# EAGLE board CT_schematic (EAGLE 7.6.0)

Size 100 x 80 mm. Coordinates in mm from the lower left corner, seen from the top.
Outline: 0,0 100,0 100,80 0,80 0,0
Copper layers (1*16): Top 0.035mm / dielectric 1.5mm / Bottom 0.035mm
Design rules "default": minimum track width 10mil, minimum drill 24mil, track to track 8mil, track to pad 8mil, pad to pad 8mil, via to via 8mil, smd to smd 8mil, copper to edge 40mil, drill to drill 8mil, minimum pad ring 10mil, minimum via ring 8mil, stop-mask expansion 4mil, vias tented up to drill 0mil, thermal gap 10mil

## Footprints (pad centres in the part's own frame; a part is rotated, then mirrored left to right if it is on the bottom)
C0603 = smd 0.8 x 0.8: 1 -0.762,0; 2 0.762,0
C0402 = smd 0.5 x 0.5: 1 -0.508,0; 2 0.508,0
C1210 = smd 1.2 x 2.5: 1 -1.524,0; 2 1.524,0
C0805 = smd 1.2 x 1.3: 1 -1.016,0; 2 1.016,0
EXV-9H = smd 3.505 x 1.676: 1 -2.857,0; 2 2.857,0
L0603 = smd 0.8 x 0.8: 1 -0.762,0; 2 0.762,0
L1210 = smd 1.2 x 2.5: 1 -1.524,0; 2 1.524,0
PJ-037B_PACKAGE = drill 3.7 square: 1 12,0 | drill 3.2 square: 2 6,0
R0603 = smd 0.8 x 0.8: 1 -0.762,0; 2 0.762,0
TSSOP20 = smd 1.473 x 0.356: 1 -2.819,2.921; 2 -2.819,2.286; 3 -2.819,1.626; 4 -2.819,0.965; 5 -2.819,0.33; 6 -2.819,-0.33; 7 -2.819,-0.965; 8 -2.819,-1.626; 9 -2.819,-2.286; 10 -2.819,-2.921; 11 2.819,-2.921; 12 2.819,-2.286; 13 2.819,-1.626; 14 2.819,-0.965; 15 2.819,-0.33; 16 2.819,0.33; 17 2.819,0.965; 18 2.819,1.626; 19 2.819,2.286; 20 2.819,2.921
SAMTEC_FTSH-105-01-L-DV-K = smd 0.762 x 2.794: 1 -2.54,-2.032; 2 -2.54,2.032; 3 -1.27,-2.032; 4 -1.27,2.032; 5 0,-2.032; 6 0,2.032; 7 1.27,-2.032; 8 1.27,2.032; 9 2.54,-2.032; 10 2.54,2.032
SSOP-16 = smd 1.981 x 0.356: 1 -2.464,2.223; 2 -2.464,1.587; 3 -2.464,0.953; 4 -2.464,0.318; 5 -2.464,-0.318; 6 -2.464,-0.953; 7 -2.464,-1.587; 8 -2.464,-2.223; 9 2.464,-2.223; 10 2.464,-1.587; 11 2.464,-0.953; 12 2.464,-0.318; 13 2.464,0.318; 14 2.464,0.953; 15 2.464,1.587; 16 2.464,2.223
182-009-MALE = drill 1.194 pad 1.524 octagon: 1 -5.537,10.923; 2 -2.769,10.923; 3 0,10.923; 4 2.769,10.923; 5 5.537,10.923; 6 -4.153,8.08; 7 -1.384,8.08; 8 1.384,8.08; 9 4.153,8.08 | hole 3.048: -12.446,9.501; 12.446,9.501
ASDMB-XX.XXXXMHZ-XX-XX-XXX = smd 0.65 x 0.85: 1 0.45,0.2; 2 2.05,0.2; 3 2.05,1.8; 4 0.45,1.8
WSON-8 = smd 0.3 x 0.6: 1 -0.75,0; 2 0.05,0; 3 0.85,0; 4 1.65,0; 5 1.65,3.8; 6 0.85,3.8; 7 0.05,3.8; 8 -0.75,3.8 | smd 3 x 2.6: PAD 0.45,1.9
SON-6 = smd 0.55 x 0.3: 1 -0.355,0.5 | smd 0.52 x 0.3: 2 -0.37,0; 3 -0.37,-0.5; 4 0.37,-0.5; 5 0.37,0; 6 0.37,0.5
SW_4-1437565-2 = smd 1.4 x 2.1: 1 -2.23,4.55; 2 -2.23,-4.55; 3 2.23,4.55; 4 2.23,-4.55
LGM67K-G1J2-24-Z = smd 0.8 x 1.4: A -2,0; C 0,0
NC7SZ125M5X = smd 1.3 x 0.7: 1 -1.3,0.95; 2 -1.3,0; 3 -1.3,-0.95; 4 1.3,-0.95; 5 1.3,0.95
DUMMY_PACKAGE_113 = drill 0.3: 1 0,-1; 2 1.5,-1; 3 3,-1

## Placement (x,y rotation side)
C1  1e-07  [C0603]  -52.07,72.39 0 top  (outside the outline)
C2  1e-07  [C0603]  -55.88,72.39 0 top  (outside the outline)
C3  4.7e-06  [C0603]  -44.45,72.39 0 top  (outside the outline)
C4  1e-08  [C0603]  -59.69,72.39 0 top  (outside the outline)
C5  1e-06  [C0603]  -63.5,72.39 0 top  (outside the outline)
C6  1e-07  [C0402]  -49.53,77.47 0 top  (outside the outline)
C7  1e-06  [C0603]  -67.31,72.39 0 top  (outside the outline)
C8  1e-06  [C0603]  -71.12,72.39 0 top  (outside the outline)
C9  2.2e-07  [C0603]  -48.26,72.39 0 top  (outside the outline)
C10  1e-06  [C0603]  -15.24,77.47 0 top  (outside the outline)
C11  1e-06  [C0603]  -19.05,77.47 0 top  (outside the outline)
C12  1e-08  [C0402]  -53.34,77.47 0 top  (outside the outline)
C13  1e-08  [C0402]  -57.15,77.47 0 top  (outside the outline)
C14  1e-05  [C1210]  -71.12,57.15 0 top  (outside the outline)
C15  1e-05  [C0805]  -34.29,66.04 0 top  (outside the outline)
C16  1e-07  [C0402]  -60.96,77.47 0 top  (outside the outline)
C17  0.0001  [EXV-9H]  -38.1,58.42 0 top  (outside the outline)
C18  0.0001  [EXV-9H]  -49.53,58.42 0 top  (outside the outline)
C19  1e-08  [C0402]  -64.77,77.47 0 top  (outside the outline)
C20  1e-08  [C0402]  -68.58,77.47 0 top  (outside the outline)
F1  240.0  [L0603]  -22.86,77.47 0 top  (outside the outline)
I1  1e-05  [L1210]  -16.51,67.31 0 top  (outside the outline)
J1  PJ-037B  [PJ-037B_PACKAGE]  -27.94,46.99 0 top  (outside the outline)
R1  10000.0  [R0603]  -59.69,66.04 0 top  (outside the outline)
R2  1000.0  [R0603]  -26.67,77.47 0 top  (outside the outline)
R3  910.0  [R0603]  -30.48,77.47 0 top  (outside the outline)
R4  4700.0  [R0603]  -34.29,77.47 0 top  (outside the outline)
R5  10000.0  [R0603]  -64.77,66.04 0 top  (outside the outline)
R6  10000.0  [R0603]  -69.85,66.04 0 top  (outside the outline)
R7  10000.0  [R0603]  -15.24,72.39 0 top  (outside the outline)
R8  10000.0  [R0603]  -20.32,72.39 0 top  (outside the outline)
R9  10000.0  [R0603]  -25.4,72.39 0 top  (outside the outline)
R10  5.0  [R0603]  -38.1,77.47 0 top  (outside the outline)
R11  100000.0  [R0603]  -39.37,66.04 0 top  (outside the outline)
R12  100000.0  [R0603]  -44.45,66.04 0 top  (outside the outline)
R13  806.0  [R0603]  -41.91,77.47 0 top  (outside the outline)
R14  1000.0  [R0603]  -45.72,77.47 0 top  (outside the outline)
R15  10000.0  [R0603]  -30.48,72.39 0 top  (outside the outline)
R16  10000.0  [R0603]  -35.56,72.39 0 top  (outside the outline)
R17  82000.0  [R0603]  -40.64,72.39 0 top  (outside the outline)
R18  300000.0  [R0603]  -49.53,66.04 0 top  (outside the outline)
R19  120000.0  [R0603]  -54.61,66.04 0 top  (outside the outline)
U1  stm32f038f6p6  [TSSOP20]  -30.48,30.48 0 top  (outside the outline)
U2  FTSH-105-01-L-DV-K  [SAMTEC_FTSH-105-01-L-DV-K]  -58.42,30.48 0 top  (outside the outline)
U3  LTC2804CGN-1#PBF  [SSOP-16]  -64.77,44.45 0 top  (outside the outline)
U4  182-009-113R531  [182-009-MALE]  -41.91,6.35 0 top  (outside the outline)
U5  ASDMB-25.000MHZ-EC-T  [ASDMB-XX.XXXXMHZ-XX-XX-XXX]  -16.51,1.27 0 top  (outside the outline)
U6  LP3878SDX-ADJ/NOPB  [WSON-8]  -30.48,57.15 0 top  (outside the outline)
U7  TPS3895ADRYR  [SON-6]  -20.32,81.28 0 top  (outside the outline)
U8  4-1437565-2  [SW_4-1437565-2]  -44.45,45.72 0 top  (outside the outline)
U9  Q65110A2395  [LGM67K-G1J2-24-Z]  -59.69,57.15 0 top  (outside the outline)
U10  nc7sz125m5x  [NC7SZ125M5X]  -21.59,66.04 0 top  (outside the outline)
U11  nc7sz125m5x  [NC7SZ125M5X]  -27.94,66.04 0 top  (outside the outline)
U12  Dummy  [DUMMY_PACKAGE_113]  -17.78,82.55 0 top  (outside the outline)

## Library data of the parts
C1-C20 F1 I1 J1 R1-R19 U1-U12 = circuit_tree

## Nets
CLK_U1_2: U1.2 U5.3
GND: C1.2 C2.2 C3.2 C4.2 C5.2 C6.2 C7.2 C8.2 C10.2 C11.2 C12.2 C13.2 C14.2 C15.2 C16.2 C17.2 C18.2 C19.2 C20.2 J1.2 R2.2 R5.2 R6.2 R10.2 R14.2 R17.2 R19.2 U1.15 U2.3 U2.5 U3.8 U4.5 U5.2 U6.3 U6.PAD U7.2 U9.C U10.2 U10.3 U11.1 U11.3 U12.1
NET_U1_1: R5.1 U1.1
NET_U1_4: R4.1 U1.4 U11.4
NET_U1_5: C4.1 C5.1 F1.1 U1.5
NET_U1_14: R6.1 U1.14
NET_U1_17: R3.1 U1.17 U9.A
NET_U1_18: R1.1 U1.18 U8.3 U8.4
NET_U2_9: R10.1 U2.9
NET_U3_6: C7.1 U3.6
NET_U3_7: C9.1 I1.2 U3.7
NET_U3_9: C8.1 U3.9
NET_U3_10: C9.2 U3.10
NET_U3_11: R11.1 U3.11
NET_U4_2: U3.1 U4.2
NET_U4_3: U3.3 U4.3
NET_U4_7: U3.2 U4.7
NET_U4_8: U3.4 U4.8
NET_U6_1: C13.1 U6.1
NET_U6_6: R13.2 R14.1 U6.6
NET_U6_8: R12.1 U6.8
NET_U7_1: R16.1 R17.1 U7.1
NET_U7_3: R18.2 R19.1 U7.3
NET_U7_4: R15.1 U7.4 U10.4 U11.2
NET_U8_1: R2.1 U8.1 U8.2
PROC_SYS_SWCLK: R8.1 U1.20 U2.4
PROC_SYS_SWDIO: R9.1 U1.19 U2.2
PROC_TIM1_CH1N: U1.13 U12.2
PROC_TIM14_CH1: U1.10 U12.3
PROC_USART1_CTS: U1.6 U3.13
PROC_USART1_RTS: U1.7 U3.15
PROC_USART1_RX: U1.9 U3.16
PROC_USART1_TX: U1.8 U3.14
RST_OUT_U2_JTAG_RST_B: R7.1 U2.10 U10.1
VCC_S1_15V5: C14.1 C17.1 C18.1 J1.1 R12.2 U6.4
VCC_TIER1_1V8: C1.1 C2.1 C3.1 C6.1 C10.1 C11.1 C12.1 C15.1 C16.1 C19.1 C20.1 F1.2 I1.1 R1.2 R3.2 R4.2 R7.2 R8.2 R9.2 R11.2 R13.1 R15.2 R16.2 R18.1 U1.16 U2.1 U3.5 U3.12 U5.4 U6.5 U7.6 U10.5 U11.5

## Tracks (layer width: path | path; a pad name or v marks a point on that pad's centre or on a via)
CLK_U1_2  (1 unrouted)
GND  (41 unrouted)
NET_U1_1  (1 unrouted)
NET_U1_4  (2 unrouted)
NET_U1_5  (3 unrouted)
NET_U1_14  (1 unrouted)
NET_U1_17  (2 unrouted)
NET_U1_18  (3 unrouted)
NET_U2_9  (1 unrouted)
NET_U3_6  (1 unrouted)
NET_U3_7  (2 unrouted)
NET_U3_9  (1 unrouted)
NET_U3_10  (1 unrouted)
NET_U3_11  (1 unrouted)
NET_U4_2  (1 unrouted)
NET_U4_3  (1 unrouted)
NET_U4_7  (1 unrouted)
NET_U4_8  (1 unrouted)
NET_U6_1  (1 unrouted)
NET_U6_6  (2 unrouted)
NET_U6_8  (1 unrouted)
NET_U7_1  (2 unrouted)
NET_U7_3  (2 unrouted)
NET_U7_4  (3 unrouted)
NET_U8_1  (2 unrouted)
PROC_SYS_SWCLK  (2 unrouted)
PROC_SYS_SWDIO  (2 unrouted)
PROC_TIM1_CH1N  (1 unrouted)
PROC_TIM14_CH1  (1 unrouted)
PROC_USART1_CTS  (1 unrouted)
PROC_USART1_RTS  (1 unrouted)
PROC_USART1_RX  (1 unrouted)
PROC_USART1_TX  (1 unrouted)
RST_OUT_U2_JTAG_RST_B  (2 unrouted)
VCC_S1_15V5  (5 unrouted)
VCC_TIER1_1V8  (32 unrouted)